# Altium PCB Main_board.PcbDoc (part 2 of 2)
Units mm, origin at the board's own origin, x right, y up, seen from the top; angles counter-clockwise.
Board outline 234.31 x 121 mm, 2 copper layers (Top Layer, Bottom Layer); 208 components, 182 nets, 717 pads, 564 vias.
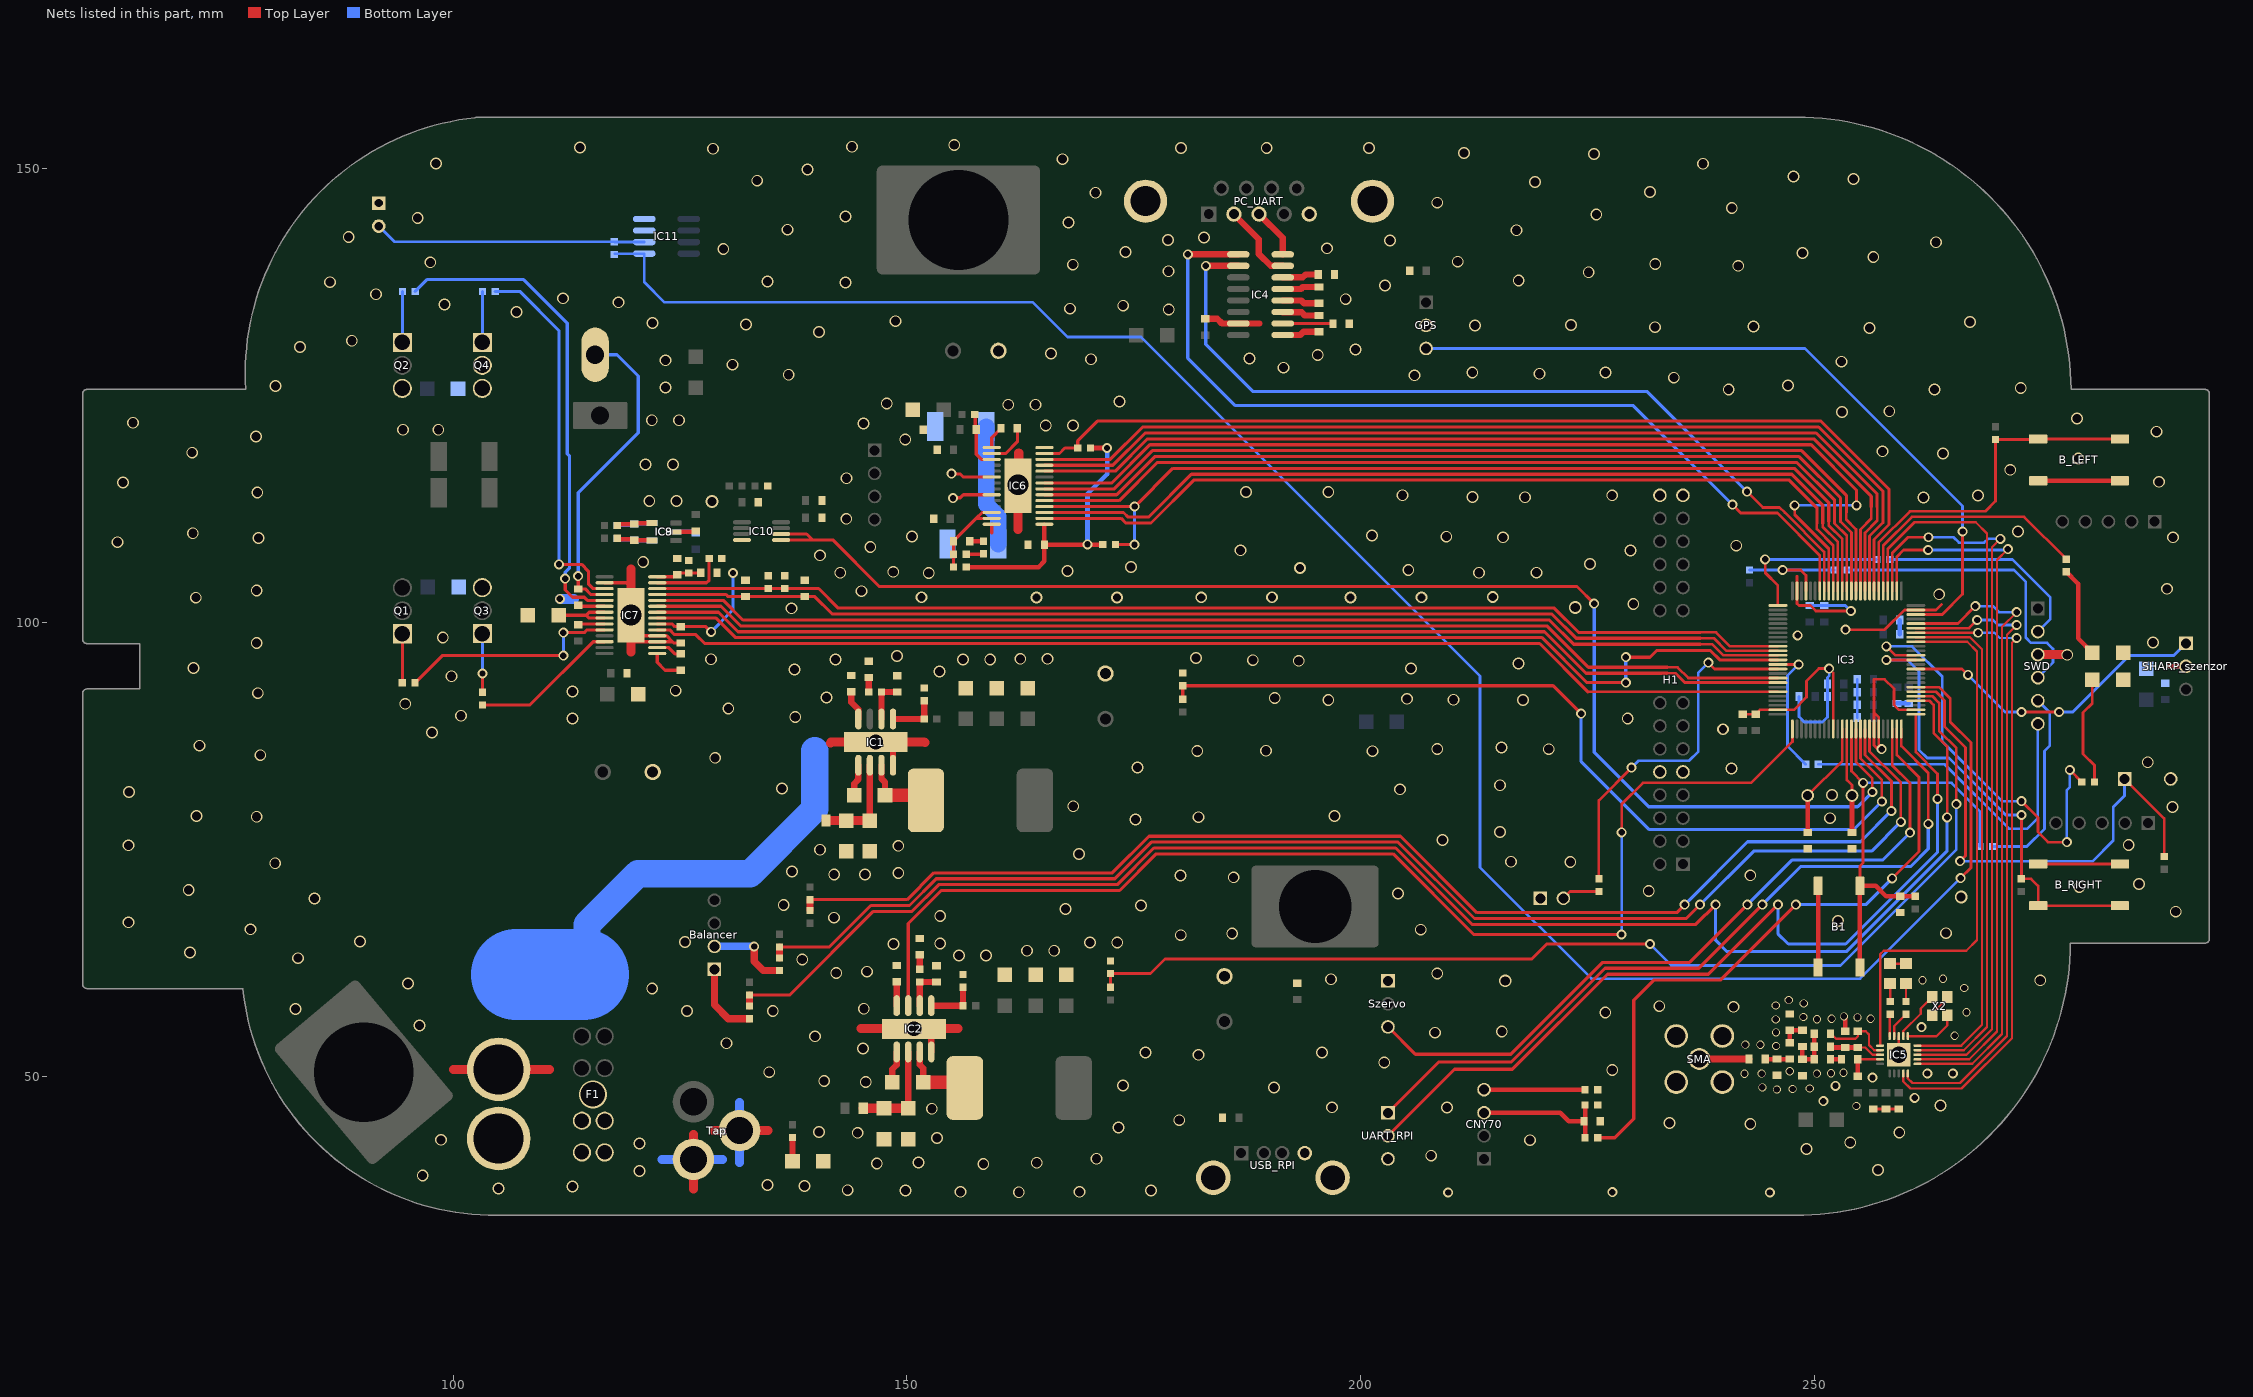
[diagram p2: the nets of this part, all layers, seen from the top]

## Via types
v1: diameter 1.3, hole 1, Top Layer to Bottom Layer, 338 vias
v2: diameter 1.1, hole 0.7, Top Layer to Bottom Layer, 154 vias
v3: diameter 0.9, hole 0.7, Top Layer to Bottom Layer, 30 vias
v4: diameter 1.3, hole 0.9, Top Layer to Bottom Layer, 11 vias
v5: diameter 5, hole 4.5, Top Layer to Bottom Layer, 10 vias
v6: diameter 1.4, hole 1, Top Layer to Bottom Layer, 5 vias
v7: diameter 1, hole 0.8, Top Layer to Bottom Layer, 4 vias
v8: diameter 1.2, hole 0.8, Top Layer to Bottom Layer, 3 vias
v9: diameter 1.6, hole 1.1, Top Layer to Bottom Layer, 2 vias
v10: diameter 2.8, hole 2.3, Top Layer to Bottom Layer, 2 vias
v11: diameter 2.1, hole 1.6, Top Layer to Bottom Layer, 2 vias
v12: diameter 3.1, hole 2.7, Top Layer to Bottom Layer, 1 vias
v13: diameter 2.3, hole 1.8, Top Layer to Bottom Layer, tented top, 1 vias
v14: diameter 1.5, hole 1, Top Layer to Bottom Layer, 1 vias

## Nets (pads, with @x,y where several pads share a name; then routed paths per layer and width w, separated by ;. In a path a pad name is that pad's centre, name@x,y a point inside that pad or via, vN(x,y) a via of type N, cw(c..) or ccw(c..) an arc to the next point about the centre after c; other vN are vias at no path point) (continued)
GND: Akku.1 B1.1 B_LEFT.1 B_RIGHT.1 C1.2 C2.2 C3.2 C5.2 C6.2 C7.2 C8.2 C9.2 C10.2 C11.2 C12.2 C13.2 C15.2 C16.2 C17.2 C18.2 C19.2 C20.2 C21.2 C22.2 C22b.2 C23.1 C24.1 C25.1 C26.1 C27.1 C28.1 C29.1 C30.2 C30b.2 C31.2 C31b.2 C32.2 C32b.2 C33.2 C34.1 C35.1 C37.1 C39.1 C40.1 C41.1 C42.1 C44.2 C45.2 C46.2 C48.1 C49.2 C50.1 C51.1 C52.1 C53.1 C56.1 C57.1 C58.2 C59.1 C60.1 C61.1 C62.1 C64.1 C67.2 C68.2 C69.1 C71.1 C73.1 C74.2 C74b.2 C75.1 C76.1 C77.2 C78.1 C79.2 C80.2 D1.2 D2.2 D3.2 D4.1 D5.1 D6.K D7.K GPS.2 H1.9 H1.10 H1.33 H1.34 IC1.4 IC1.9 IC2.4 IC2.9 IC3.10 IC3.19 IC3.20 IC3.27 IC3.49 IC3.74 IC3.99 IC4.15 IC5.18 IC5.21 IC6.14 IC6.28 IC6.29 IC7.2 IC7.17 IC7.18 IC7.29 IC8.2 IC9.2 IC10.4 IC11.3 IC11.4 PC_UART.5 PC_UART.10 PC_UART.11 Q3.3 Q4.3 R4.1 R7.1 R15.1 R17.1 R32.1 R33.1 R34.1 R35.1 R37.1 R39.1 R41.1 R53.1 R55.1 R56.1 R_Th.3 SHARP_szenzor.2 SMA.2 SWD.3 Szervo.1 Tap.2 Tap.3 UART_RPI.3 USB_RPI.4 USB_RPI.5 USB_RPI.6 X2.2 X2.4 | length 299.3
  Top Layer w0.25: v13(259.267,52.41) IC5.18@259.267,54.46 ; X2.4@262.957,56.773 X2.4@262.957,56.957
  Top Layer w0.254: X2.4@262.967,56.957 X2.2@264.617,58.607
  Top Layer w0.3: C61.1@124.959,97.886 C61.1@125.074,97.771 ; C34.1@242.1,89.92 C33.2@243.5,89.92 243.987,90.407 IC3.99@245.954,90.407 247.707,90.407 249.1,91.8 249.1,93.58 250.47,94.95 v2(251.6,94.95) ; 248.054,105.116 IC3.74@248.054,103.507 248.054,102.106 248.27,101.89 249.54,101.89 250.14,101.29 v2(254,101.29) ; IC3.10@252.054,88.307 252.054,94.496 ; v2(253.41,99.24) 257.73,99.24 259.897,101.407 IC3.49@261.154,101.407 263.357,101.407 263.97,102.02 ; C40.1@256.469,46.43 C41.1@257.869,46.43 C42.1@259.269,46.43 ; v2@257.05,86.01 256.554,86.506 IC3.19@256.554,88.307 256.554,90.096 ; v2(257.38,86.08) 257.054,86.406 IC3.20@257.054,88.307 257.054,89.596 256.554,90.096 ; D6.K@258.32,62.45 D7.K@260.08,62.45 ; IC3.27@261.154,90.407 259.273,90.407 258.75,90.93 258.75,92.74 257.72,93.77 256.554,93.77 256.554,90.096
  Top Layer w0.35: IC7.2@116.7,104.411 119.089,104.411 119.62,103.88 ; IC7.29@119.33,98.561 IC7.18@122.5,98.561 123.53,98.561 124.18,97.911 ; IC7.29@119.58,97.911 IC7.17@122.5,97.911 124.18,97.911 ; C61.1@125.074,97.771 124.32,97.771 124.18,97.911 ; 159.35,109.9 IC6.14@159.35,110.851 ; B_RIGHT.1@274.63,73.43 B_RIGHT.1@283.63,73.43
  Top Layer w0.5: IC9.2@124.577,110.02 C71.1@126.66,110.02 ; C57.1@156.93,108.99 R32.1@158.44,108.99 ; B1.1@250.39,62.02 B1.1@250.39,71.02 ; C48.1@253.37,55.01 v3@253.37,56.49 ; B_LEFT.1@274.54,115.64 B_LEFT.1@283.74,115.64 ; 289.05,95.2 SHARP_szenzor.2@290.91,95.2
  Top Layer w0.7: IC1.4@148.469,84.301 IC1.9@148.469,86.51 ; IC2.4@152.689,52.721 IC2.9@152.689,55.283 ; C35.1@182.88,133.48 184.2,133.48 184.714,132.966 IC4.15@186.51,132.966 188.816,132.966
  Top Layer w1: 100.037,50.803 110.62,50.803 ; 119.62,96.79 v10(119.62,100.836) 119.62,103.88 119.62,105.9 ; 126.49,37.62 126.49,43.63 ; 128.7,44.055 134.685,44.055 ; 141.57,86.77 141.663,86.863 v11(146.564,86.863) 151.917,86.863 151.99,86.79 ; 144.933,55.283 v11(150.784,55.283) 152.689,55.283 155.643,55.283 ; 162.25,110.29 IC6.29@162.25,115.076 v10(162.25,115.2) 162.324,115.274 162.324,118.696 ; SWD.3@274.59,96.49 v1@277.81,96.49
  Bottom Layer w0.3: C21.2@248.27,91.87 248.27,89.65 248.86,89.06 250.88,89.06 251.42,89.6 C22.2@251.42,91.87 C22b.2@251.42,93.25 251.42,93.97 251.6,94.15 v2(251.6,94.95) ; C29.1@254.7,89.56 C28.1@254.7,90.96 C27.1@254.7,92.36 C26.1@254.7,93.76
  Bottom Layer w0.35: C32.2@249.45,101.89 C32b.2@251.06,101.89 253.4,101.89 v2(254,101.29) ; C32.2@249.52,101.92 C32.2@249.571,101.92
  Bottom Layer w0.5: IC8.2@124.577,110.02 C69.1@126.76,110.02 ; C30.2@259.07,91.11 C30b.2@260.36,91.11 ; C31b.2@259.37,98.75 C31.2@259.37,100.3 ; 289.01,95.2 SHARP_szenzor.2@290.91,95.2
  Bottom Layer w1: 123.04,40.88 Tap.2@126.49,40.88 129.68,40.88 ; 131.57,40.52 Tap.3@131.57,44.055 131.57,47.14
  Bottom Layer w1.1: v2(111.77,102.63) 113.31,102.63
  Bottom Layer w1.8: R33.1@158.744,121.625 158.744,113.056 160.074,111.726 R34.1@160.074,108.655
  Bottom Layer w3: 114.75,60.03 114.75,66.73 120.37,72.35 132.73,72.35 139.86,79.48 139.86,85.9
  Bottom Layer w10: 106.97,61.26 114.38,61.26
  other v1: 162.33,37.26 155.91,37.31 169.01,37.31 149.84,37.44 176.89,37.45 143.48,37.49 105,37.69 113.16,37.89 138.71,37.94 134.63,38.07 96.66,39.12 120.56,39.62 256.97,39.7 158.42,40.39 146.69,40.43 164.31,40.51 151.27,40.53 170.9,40.95 207.76,41.29 249.09,42.02 120.56,42.62 253.93,42.76 218.63,43 98.69,43.04 153.33,43.25 144.58,43.81 259.33,43.86 140.32,43.9 173.3,44.41 242.92,44.78 234,44.9 180.01,45.2 152.75,46.46 196.82,46.62 209.5,46.6 263.87,46.82 190.44,48.8 173.8,49.02 145.47,49.42 140.89,49.52 134.84,50.49 227.71,50.73 202.59,51.56 182.12,52.4 176.29,52.66 195.72,52.67 145.17,53.09 130.14,53.68 139.87,54.44 208.17,54.84 215.54,54.98 96.31,55.63 226.94,57.08 125.79,57.23 135.23,57.23 82.65,57.46 145.26,57.48 241.05,57.69 232.89,57.76 121.94,59.72 95.04,60.25 274.86,60.61 196.73,60.73 208.43,61.35 142.22,61.42 145.6,61.56 138.47,62.91 82.91,63.05 155.73,63.33 158.73,63.33 71.01,63.66 163.23,63.87 166.23,63.87 148.52,64.6 153.67,64.68 170.18,64.77 173.18,64.77 125.57,64.84 89.75,64.89 180.17,65.58 185.84,65.76 264.49,65.8 206.61,66.19 77.7,66.23 64.25,67 252.57,67.15 141.96,67.51 153.67,67.68 289.78,68.17 167.49,68.48 175.8,68.84 136.43,68.92 84.75,69.63 204.12,70.18 231.73,70.45 70.88,70.55 279.16,70.87 285.74,71.23 186,71.96 180.14,72.17 242.92,72.18 141.99,72.26 145.38,72.27 149.06,72.43 137.33,72.59 80.41,73.51 223.09,73.63 216.56,73.67 168.97,74.53 140.43,74.99 149.06,75.43 64.24,75.48 284.6,75.51 209.02,76.08 215.34,76.96 175.17,78.31 251.71,78.47 182.14,78.58 78.37,78.63 71.73,78.7 197.1,78.72 289.42,79.72 168.33,79.79 251.91,81.04 64.31,81.35 204.31,81.65 136.23,81.73 215.34,82.1 240.83,83.93 175.41,84.04 286.7,84.63 128.88,85.12 78.77,85.41 201.28,85.85 181.99,85.87 189.55,85.9 220.71,86.07 208.43,86.1 215.52,86.27 72.06,86.46 97.69,87.92 113.17,89.44 229.41,89.46 137.7,89.63 100.89,89.76 130.33,90.55 94.74,91.07 196.43,91.49 217.89,91.49 210.22,91.52 205.11,91.62 190.53,91.7 141.13,91.77 78.5,92.24 113.17,92.44 124.53,92.52 99.85,94.11 153.58,94.63 137.62,94.84 205.53,94.95 71.4,95.01 217.38,95.5 193.17,95.81 188.11,95.88 142.14,95.94 156.18,95.94 159.18,95.94 128.43,95.98 162.5,96.03 165.5,96.03 181.84,96.13 148.9,96.34 277.83,96.47 78.37,97.77 287.29,97.83 98.88,98.39 137.3,101.59 230.03,102.06 71.67,102.76 263.72,103.13 145,103.48 78.37,103.55 288.82,103.74 152.41,105.47 142.66,105.51 213.03,105.51 219.37,105.52 148.5,105.61 167.71,105.7 205.24,105.82 174.68,106.14 225.24,106.48 120.95,106.71 140.44,107.43 229.73,107.96 186.75,107.98 145.97,108.33 241.37,108.49 63.05,108.88 78.57,109.34 215.66,109.41 289.47,109.41 209.43,109.48 150.57,109.5 201.24,109.6 71.34,109.86 272.42,110.07 143.33,111.45 121.63,113.42 124.63,113.42 261.98,113.79 218.11,113.83 212.32,113.86 268.01,114.03 204.6,114.05 227.7,114.04 78.44,114.34 187.35,114.42 196.43,114.42 63.64,115.45 287.93,115.53 143.34,115.92 271.55,116.85 121.22,117.42 124.22,117.42 279.05,118.1 264.16,118.66 71.27,118.74 257.47,118.89 149.82,120.19 78.31,120.52 287.68,121.05 94.48,121.26 98.38,121.26 165.3,121.74 168.3,121.74 145.21,121.94 64.76,122.03 121.9,122.31 124.9,122.31 278.89,122.5 253.01,123.21 258.23,123.3 161.17,124.02 164.17,124.02 147.78,124.15 173.43,124.38 263.2,125.69 240.53,125.71 272.71,125.85 123.4,125.91 80.45,126.07 247.07,126.15 234.49,127 205.92,127.26 136.98,127.32 219.68,127.43 212.29,127.57 226.97,127.57 191.48,128.1 130.79,128.43 252.96,128.76 123.4,128.91 170.3,129.03 187.74,129.1 195.26,129.5 165.89,129.65 199.43,130.11 83.13,130.37 88.85,131.07 140.33,132.04 256.04,132.48 232.4,132.56 243.26,132.63 212.59,132.76 223.15,132.8 132.29,132.87 121.98,133.03 267.12,133.12 148.74,133.22 106.99,134.25 178.85,134.51 167.97,134.6 173.83,134.93 99.06,135.06 118.24,135.3 198.34,135.65 112.13,135.74 91.53,136.19 202.66,137.16 143.24,137.5 86.44,137.52 134.65,137.6 217.4,137.72 225.11,138.61 178.82,138.72 241.59,139.32 168.28,139.45 232.44,139.52 97.5,139.71 210.69,139.78 256.47,140.3 248.65,140.73 174.08,140.84 129.78,141.16 196.28,141.25 263.38,141.92 203.22,142.1 178.76,142.15 182.72,142.43 88.51,142.49 217.16,143.24 136.86,143.3 167.8,144.1 96.11,144.58 143.24,144.74 225.95,144.98 240.88,145.68 208.43,146.28 170.79,147.37 231.87,147.45 219.2,148.57 133.51,148.7 254.3,148.89 247.67,149.16 139.04,149.93 237.69,150.57 98.12,150.59 167.16,151.07 225.7,151.65 211.37,151.75 128.64,152.22 180.19,152.3 189.64,152.3 200.9,152.3 113.98,152.34 143.95,152.44 155.22,152.64
  other v2: 209.63,37.24 245.07,37.24 227.71,37.27 250.97,47.29 261.03,47.66 252.3,48.99 256.38,49.88 262.42,50.34 265.23,50.35 261.77,55.45 248.13,98.62
  other v3: 254.6,46.76 245.84,48.59 247.58,48.64 249.46,48.7 244.25,48.82 242.28,50.32 244.16,50.33 250.25,50.33 251.8,50.37 253.18,50.43 247.27,50.59 245.76,53.37 242.37,53.53 244.03,53.51 265.42,54.5 245.74,54.87 245.71,56.31 250.27,56.33 251.87,56.38 256.17,56.38 254.73,56.53 248.76,56.57 253.22,56.64 266.74,57.09 245.72,57.83 248.8,58.07 247.15,58.43 266.48,59.76 261.88,60.62 264.15,60.79
  other v4: 239.9,88.26 164.28,102.79 173.16,102.79 182.43,102.8 198.88,102.79 206.68,102.8 151.6,102.81 190.23,102.81 214.54,102.85 193.32,106.04
  other v6: 215.92,60.55 266.14,69.79 223.63,101.67 128.54,113.37
  other v12: 115.417,48.037
NetAkku_2: Akku.2 F1.1
NetB1_2: B1.2 C25.2 IC3.14 R18.2 R59.2 | length 51.6
  Top Layer w0.3: IC3.14@254.054,88.307 254.054,83.646 v2(255.34,82.36) 255.34,73.55 254.99,73.2 B1.2@254.99,71.02
  Top Layer w0.5: B1.2@254.99,62.02 B1.2@254.99,71.02 256.72,71.02 257.87,69.87 C25.2@259.44,69.87 R18.2@261.09,69.87
  Bottom Layer w0.3: v2(255.34,82.36) 265.08,82.36 268.23,79.21 R59.2@268.23,75.35
NetB_LEFT_2: B_LEFT.2 IC3.56 R24.2 | length 40.6
  Top Layer w0.3: IC3.56@257.054,103.507 257.054,108.834 260.49,112.27 268.8,112.27 269.93,113.4 R24.2@269.93,120.2 274.586,120.2 B_LEFT.2@274.63,120.244 B_LEFT.2@283.63,120.244
NetB_RIGHT_2: B_RIGHT.2 IC3.38 R19.1 | length 50.7
  Top Layer w0.3: v2@257.917,95.907 IC3.38@261.154,95.907 ; R19.1@272.77,71.79 R19.1@272.78,71.79 ; v2@272.78,78.83 R19.1@272.78,71.79 ; B_RIGHT.2@283.63,68.83 B_RIGHT.2@274.63,68.83 274.63,71.01 273.85,71.79 R19.1@272.78,71.79
  Bottom Layer w0.3: v2(257.91,95.9) 260.24,95.9 261.51,94.63 261.51,85.99 262.41,85.09 264.8,85.09 271.06,78.83 v2(272.79,78.83)
NetC1_1: C1.1 C2.1 IC1.2 L1.2 | length 10.9
  Top Layer w0.7: C2.1@145.929,78.219 IC1.2@145.929,84.301
  Top Layer w1: L1.2@141.079,78.219 C2.1@145.929,78.219
NetC3_1: C3.1 IC1.8 | length 3.3
  Top Layer w0.7: C3.1@143.89,92.39 143.89,91.24 144.659,90.471 IC1.8@144.659,89.401
NetC4_1: C4.1 IC1.1 | length 3.5
  Top Layer w0.7: C4.1@144.19,81 144.19,82.26 144.659,82.729 IC1.1@144.659,84.301
NetC4_2: C4.2 IC1.3 L2.1 | length 7.4
  Top Layer w0.7: IC1.3@147.199,84.301 147.199,82.831 147.59,82.44 C4.2@147.59,81
  Top Layer w1.5: C4.2@147.59,81 L2.1@151.532,81
NetC5_1: C5.1 R2.1 | length 1.6
  Top Layer w0.7: R2.1@145.8,92.37 C5.1@145.8,93.96
NetC6_1: C6.1 IC1.6 R2.2 | length 4.7
  Top Layer w0.7: IC1.6@147.199,89.401 147.199,92.369 C6.1@148.93,92.37
NetC11_1: C11.1 C12.1 IC2.2 L3.2 | length 11.2
  Top Layer w0.7: C12.1@150.15,46.52 IC2.2@150.149,52.721
  Top Layer w1: L3.2@145.19,46.52 C12.1@150.15,46.52
NetC13_1: C13.1 IC2.8 | length 2.6
  Top Layer w0.7: IC2.8@148.879,57.821 C13.1@148.879,60.439
NetC14_1: C14.1 IC2.1 | length 3.5
  Top Layer w0.7: C14.1@148.39,49.38 148.39,50.8 148.879,51.289 IC2.1@148.879,52.721
NetC14_2: C14.2 IC2.3 L4.1 | length 7.5
  Top Layer w0.7: IC2.3@151.419,52.721 151.419,51.301 151.79,50.93 C14.2@151.79,49.38
  Top Layer w1.5: C14.2@151.79,49.38 L4.1@155.752,49.38
NetC15_1: C15.1 R5.1 | length 1.6
  Top Layer w0.7: R5.1@151.42,61.82 C15.1@151.42,63.43
NetC16_1: C16.1 IC2.6 R5.2 | length 4.4
  Top Layer w0.7: IC2.6@151.419,57.821 R5.2@151.42,60.42 R5.2@151.42,60.42 C16.1@153.27,60.42
NetC23_2: C23.2 IC3.12 X1.2 | length 13
  Top Layer w0.3: X1.2@249.237,80.967 253.054,84.784 IC3.12@253.054,88.307
  Top Layer w0.5: C23.2@249.237,76.9 X1.2@249.237,80.967
NetC24_2: C24.2 IC3.13 X1.1 | length 11.6
  Top Layer w0.3: IC3.13@253.554,88.307 253.554,82.676 254.117,82.113 X1.1@254.117,80.967
  Top Layer w0.5: C24.2@254.117,76.9 X1.1@254.117,80.967
NetC36_1: C36.1 IC4.3 | length 4.2
  Top Layer w0.7: IC4.3@191.41,134.236 191.41,134.19 193.5,134.19 193.84,133.85 C36.1@195.4,133.85
NetC36_2: C36.2 IC4.1 | length 4.1
  Top Layer w0.7: IC4.1@191.41,131.696 193.346,131.696 193.7,132.05 C36.2@195.4,132.05
NetC37_2: C37.2 IC4.2 | length 5.5
  Top Layer w0.35: IC4.2@191.41,132.966 C37.2@196.94,132.966
NetC38_1: C38.1 IC4.5 | length 4.1
  Top Layer w0.7: IC4.5@191.41,136.776 193.416,136.776 193.63,136.99 C38.1@195.4,136.99
NetC38_2: C38.2 IC4.4 | length 4.1
  Top Layer w0.7: IC4.4@191.41,135.506 193.434,135.506 193.75,135.19 C38.2@195.4,135.19
NetC39_2: C39.2 IC4.6 | length 4
  Top Layer w0.7: IC4.6@191.41,138.046 193.626,138.046 193.95,138.37 C39.2@195.31,138.37
NetC43_1: C43.1 IC5.4 L6.2 | length 4.3
  Top Layer w0.25: C43.1@254.76,51.91 IC5.4@257.217,51.91
  Top Layer w0.5: L6.2@254.76,50.03 C43.1@254.76,51.91
NetC43_2: C43.2 L7.2 | length 1.2
  Top Layer w0.5: L7.2@251.76,51.91 C43.2@252.96,51.91
NetC44_1: C44.1 C47.1 L7.1 L8.2 L11.1 | length 5.5
  Top Layer w0.5: L8.2@248.66,53.31 C44.1@248.66,51.91 L7.1@249.96,51.91 L11.1@249.96,53.31 C47.1@249.96,54.71
NetC45_1: C45.1 L8.1 L9.2 | length 2.8
  Top Layer w0.5: L9.2@247.26,53.74 C45.1@247.26,55.11 L8.1@248.66,55.11
NetC46_1: C46.1 CC1.2 L9.1 | length 2.7
  Top Layer w0.5: CC1.2@244.56,51.94 L9.1@247.26,51.94
NetC47_2: C47.2 IC5.2 L10.1 | length 7.8
  Top Layer w0.25: C47.2@251.836,54.71 252.361,54.185 254.515,54.185 254.77,54.44 L10.1@254.77,55.01 255.63,55.01 256,54.64 256,53.49 256.58,52.91 IC5.2@257.217,52.91
NetC48_2: C48.2 IC5.3 L10.2 L11.2 | length 5.7
  Top Layer w0.25: L10.2@254.77,53.21 255.58,53.21 256.38,52.41 IC5.3@257.217,52.41
  Top Layer w0.5: L11.2@251.86,53.21 C48.2@253.37,53.21 L10.2@254.77,53.21
NetC54_1: C54.1 IC6.3 R27.2 | length 6.2
  Top Layer w0.35: C54.1@157.54,121.45 R27.2@157.54,122.95 ; C54.1@157.64,121.29 157.64,118.57 158.209,118.001 IC6.3@159.35,118.001
NetC55_1: C55.1 IC6.2 | length 4.8
  Top Layer w0.35: IC6.2@159.35,118.651 160.891,118.651 162.17,119.93 C55.1@162.17,121.42
NetC55_2: C55.2 IC6.1 | length 2.5
  Top Layer w0.35: IC6.1@159.35,119.301 159.35,120.4 C55.2@160.37,121.42
NetC57_2: C57.2 IC6.12 IC6.13 R30.1 R31.2 | length 10.1
  Top Layer w0.35: R30.1@155.13,106.15 C57.2@155.13,108.99 157.641,111.501 ; IC6.13@159.35,111.501 157.641,111.501 ; IC6.12@159.35,112.151 158.291,112.151 157.641,111.501
NetC61_2: C61.2 IC7.20 R36.2 R38.2 R40.2 | length 13.8
  Top Layer w0.35: IC7.20@122.5,99.861 124.156,99.861 124.447,99.571 C61.2@125.074,99.571 127.859,99.571 v2(128.43,99)
  Bottom Layer w0.35: v2(128.43,99) 130.85,101.42 v2(130.85,105.48)
NetC62_2: C62.2 IC7.28 R40.1 R41.2 | length 5.1
  Top Layer w0.35: IC7.28@122.5,105.061 124.285,105.061 124.7,105.476 127.376,105.476 R40.1@127.39,105.49
NetC63_1: C63.1 IC7.16 | length 2.9
  Top Layer w0.35: IC7.16@122.5,97.261 123.759,97.261 124.444,96.576 C63.1@125.074,96.576
NetC63_2: C63.2 IC7.15 | length 3.9
  Top Layer w0.35: IC7.15@122.5,96.611 122.5,95.63 123.354,94.776 C63.2@125.074,94.776
NetC64_2: C64.2 IC7.7 IC7.8 | length 7.4
  Top Layer w0.35: C64.2@111.63,100.83 114.68,100.83 ; IC7.8@116.7,100.511 114.999,100.511 114.68,100.83 ; IC7.7@116.7,101.161 115.011,101.161 114.68,100.83
NetC65_1: C65.1 IC7.9 | length 2.8
  Top Layer w0.35: C65.1@113.861,99.861 IC7.9@116.7,99.861
NetC66_1: C66.1 IC7.6 | length 2.8
  Top Layer w0.35: C66.1@113.909,101.811 IC7.6@116.7,101.811
NetC66_2: C66.2 IC7.4 M1.2 Q2.3 Q4.2 | length 35.1
  Top Layer w0.35: v2(113.79,105.14) C66.2@113.79,103.73 114.56,103.73 115.179,103.111 IC7.4@116.7,103.111
  Bottom Layer w0.35: v2(113.79,105.14) 113.79,114.32 120.41,120.94 120.41,127.18 118.065,129.525 M1.2@115.658,129.525
NetC70_1: C70.1 IC8.4 R49.1 | length 3.6
  Bottom Layer w0.5: R49.1@118.3,109.18 C70.1@119.98,109.18 ; C70.1@120,109.07 IC8.4@121.923,109.07
NetC70_2: C70.2 IC8.5 R48.1 | length 3.6
  Bottom Layer w0.5: R48.1@118.25,110.81 C70.2@119.98,110.81 ; C70.2@120.06,110.97 IC8.5@121.923,110.97
NetC72_1: C72.1 IC9.4 R51.1 | length 3.6
  Top Layer w0.5: R51.1@118.25,110.83 C72.1@119.98,110.83 ; C72.1@120.06,110.97 IC9.4@121.923,110.97
NetC72_2: C72.2 IC9.5 R50.1 | length 3.7
  Top Layer w0.5: R50.1@118.22,109.18 C72.2@119.98,109.18 ; C72.2@120,109.07 IC9.5@121.923,109.07
NetC76_2: C76.2 CNY70.3 R54.1 R55.2 | length 15.1
  Top Layer w0.5: CNY70.3@213.58,46.02 221.96,46.02 222.9,45.08 C76.2@224.71,45.08 ; R54.1@224.71,43.28 C76.2@224.71,45.08 ; R55.2@224.71,46.87 C76.2@224.71,45.08 ; C76.2@224.72,45.08 C76.2@224.71,45.08
NetCC1_1: CC1.1 SMA.1 | length 5.5
  Top Layer w0.8: SMA.1@237.3,51.94 CC1.1@242.76,51.94
NetCNY70_4: CNY70.4 R56.2 | length 11.1
  Top Layer w0.5: CNY70.4@213.58,48.56 R56.2@224.7,48.56
NetD1_1: D1.1 R1.1 | length 2.6
  Top Layer w0.7: D1.1@137.4,40.67 R1.1@137.4,43.29
NetD2_1: D2.1 R20.2 | length 12.2
  Top Layer w0.3: D2.1@280.6,93.707 280.6,91.13 279.57,90.1 279.57,85.56 280.83,84.3 R20.2@280.83,82.46
NetD3_1: D3.1 R23.1 | length 10.1
  Top Layer w0.5: R23.1@277.73,105.607 279.02,104.317 279.02,98.287 D3.1@280.6,96.707
NetD4_2: D4.2 IC11.2 R22.1 | length 29.9
  Bottom Layer w0.3: D4.2@91.82,143.69 93.54,141.97 R22.1@117.75,141.97 ; R22.1@117.785,141.935 IC11.2@121.07,141.935
NetD5_2: D5.2 R22b.1 | length 4.2
  Top Layer w0.3: D5.2@222.32,69.65 223.07,70.4 R22b.1@226.24,70.4
NetD6_1: D6.A R25.1 | length 2
  Top Layer w0.25: R25.1@258.32,58.28 D6.A@258.32,60.25
NetD7_1: D7.A R26.1 | length 2
  Top Layer w0.25: R26.1@260.08,58.28 D7.A@260.08,60.25
NetGPS_3: GPS.3 IC3.48 | length 82.6
  Top Layer w0.3: IC3.48@261.154,100.907 264.057,100.907 266.3,103.15 v2(266.3,110.05)
  Bottom Layer w0.3: GPS.3@206.7,130.22 248.95,130.22 266.3,112.87 v2(266.3,110.05)
NetIC1_5: IC1.5 R3.2 R4.2 | length 5.4
  Top Layer w0.7: IC1.5@148.469,89.401 151.891,89.401 R3.2@151.9,89.41 R4.2@151.9,91.41
NetIC2_5: IC2.5 R6.2 R7.2 | length 5.5
  Top Layer w0.7: IC2.5@152.689,57.821 R6.2@156.18,57.82 156.18,57.822 R7.2@156.18,59.84
NetIC2_7: IC2.7 IC3.1 | length 131.9
  Top Layer w0.3: v2(228.74,76.92) 228.74,80.01 231.09,82.36 243.01,82.36 247.554,86.904 IC3.1@247.554,88.307
  Top Layer w0.35: IC2.7@150.149,57.821 150.149,66.869 153.78,70.5 173.438,70.5 177.478,74.54 203.57,74.54 212.45,65.66 v2(228.73,65.66)
  Bottom Layer w0.3: v2@228.74,65.66 v2(228.74,76.92)
NetIC3_15: IC3.15 IC10.5 IC10.6 | length 154.1
  Top Layer w0.3: IC3.15@254.554,88.307 254.554,84.656 256.36,82.85 v2(256.36,81.35)
  Top Layer w0.35: IC10.5@136.14,109.125 139.605,109.125 ; IC10.6@136.14,109.775 138.955,109.775 139.605,109.125 ; v2(225.72,102.1) 223.82,104 146.96,104 141.835,109.125 139.605,109.125
  Bottom Layer w0.35: v2(225.72,102.1) 225.72,85.72 231.71,79.73 254.74,79.73 v2(256.36,81.35)
NetIC3_16: IC3.16 R16.1 R17.2 | length 98.4
  Top Layer w0.3: IC3.16@255.054,88.307 255.054,85.046 257.41,82.69 v2(257.41,80.31)
  Top Layer w0.35: R16.1@180.4,91.57 R17.2@180.4,93.07 221.19,93.07 v2(224.28,89.98)
  Bottom Layer w0.35: v2(224.28,89.98) 224.28,84.7 231.74,77.24 254.34,77.24 v2(257.41,80.31)
NetIC3_17: IC3.17 R8.1 R9.2 | length 141.6
  Top Layer w0.3: IC3.17@255.554,88.307 255.554,85.446 258.46,82.54 v2(258.46,79.27)
  Top Layer w0.35: R9.2@139.32,69.5 150.022,69.5 152.972,72.45 172.63,72.45 176.67,76.49 204.378,76.49 212.798,68.07 234.807,68.07 v2(235.677,68.94)
  Top Layer w0.8: R8.1@139.32,68.3 R9.2@139.32,69.5
  Bottom Layer w0.35: v2(235.677,68.94) 242.607,75.87 255.06,75.87 v2(258.46,79.27)
NetIC3_18: IC3.18 R10.1 R11.2 | length 149.1
  Top Layer w0.3: IC3.18@256.054,88.307 256.054,85.836 259.5,82.39 v2(259.5,78.07)
  Top Layer w0.35: R11.2@135.97,64.28 141.47,64.28 146.04,68.85 150.292,68.85 153.242,71.8 172.899,71.8 176.939,75.84 204.108,75.84 212.528,67.42 235.85,67.42 v2(237.37,68.94)
  Top Layer w0.8: R10.1@135.97,63.08 R11.2@135.97,64.28
  Bottom Layer w0.35: v2(237.37,68.94) 243.28,74.85 256.28,74.85 v2(259.5,78.07)
NetIC3_23: IC3.23 Szervo.3 | length 81.1
  Top Layer w0.3: IC3.23@258.554,88.307 258.554,84.276 260.5,82.33 260.5,76.93 v2@260.45,76.88
  Top Layer w0.35: Szervo.3@203,55.48 206.02,52.46 216.52,52.46 226.64,62.58 236.23,62.58 v2(242.59,68.94)
  Bottom Layer w0.35: v2(242.59,68.94) 247.5,73.85 257.48,73.85 v2(260.51,76.88)
NetIC3_24: IC3.24 R54.2 | length 70.6
  Top Layer w0.3: v2(258.54,71.85) 261.51,74.82 261.51,82.98 259.054,85.436 IC3.24@259.054,88.307
  Top Layer w0.35: R54.2@226.1,43.27 228,43.27 230.07,45.34 230.07,58.42 232.28,60.63 239.61,60.63 v2(247.93,68.95)
  Bottom Layer w0.35: v2(247.93,68.95) 255.64,68.95 v2(258.54,71.85)
NetIC3_25: IC3.25 UART_RPI.1 | length 86
  Top Layer w0.3: IC3.25@259.554,88.307 259.554,86.416 262.52,83.45 v2(262.52,77.84)
  Top Layer w0.35: UART_RPI.1@203,46.02 208.59,51.61 216.589,51.61 226.909,61.93 237.23,61.93 v2(244.24,68.94)
  Bottom Layer w0.35: v2(244.24,68.94) 248.44,73.14 260.56,73.14 262.52,75.1 v2(262.52,77.84)
NetIC3_26: IC3.26 UART_RPI.2 | length 94.8
  Top Layer w0.3: IC3.26@261.154,89.907 261.154,85.746 263.54,83.36 v2(263.54,80.61)
  Top Layer w0.35: UART_RPI.2@203,43.48 210.33,50.81 216.708,50.81 227.178,61.28 238.3,61.28 v2(245.96,68.94)
  Bottom Layer w0.35: v2(245.96,68.94) 245.96,65.76 247.11,64.61 253.417,64.61 263.55,74.743 v2@263.55,80.35
NetIC3_29: IC3.29 R12.1 R13.2 | length 172.1
  Top Layer w0.3: IC3.29@261.154,91.407 262.643,91.407 263.12,90.93 263.12,87.84 264.6,86.36 v2(264.6,78.57)
  Top Layer w0.35: R13.2@132.67,58.99 137.099,58.99 146.309,68.2 150.561,68.2 153.511,71.15 173.168,71.15 177.208,75.19 203.839,75.19 212.259,66.77 236.92,66.77 v2(239.09,68.94)
  Top Layer w0.8: R12.1@132.67,57.79 R13.2@132.67,58.99
  Bottom Layer w0.35: v2(239.09,68.94) 239.09,65.03 240.35,63.77 253.496,63.77 264.6,74.874 v2(264.6,78.57)
NetIC3_30: IC3.30 R14.1 R15.2 | length 122.1
  Top Layer w0.3: R14.1@172.43,59.85 172.43,61.35 176.82,61.35 178.43,62.96 218.84,62.96 220.49,64.61 v2(231.86,64.61) ; IC3.30@261.154,91.907 262.993,91.907 263.72,91.18 263.72,88.089 265.61,86.199 v2(265.61,80.02)
  Bottom Layer w0.3: v2(231.86,64.61) 234.22,62.25 252.86,62.25 265.61,75 v2(265.61,80.02)
NetIC3_31: IC3.31 R21.2 R_Th.1 | length 57.9
  Top Layer w0.3: IC3.31@261.154,92.407 263.343,92.407 264.32,91.43 264.32,88.57 266.62,86.27 266.62,74.33 v2(266.03,73.74) ; R_Th.1@284.15,82.79 288.51,78.43 R21.2@288.51,74.26
  Bottom Layer w0.3: v2(266.03,73.74) 280.65,73.74 282.9,75.99 282.9,79.69 284.15,80.94 R_Th.1@284.15,82.79
NetIC3_32: IC3.32 IC11.1 R22.2 | length 225.6
  Top Layer w0.3: IC3.32@261.154,92.907 263.703,92.907 264.93,91.68 264.93,89.096 267.22,86.806 267.22,73.01 v2(266.08,71.87)
  Bottom Layer w0.3: R22.2@117.845,140.665 IC11.1@121.07,140.665 121.07,137.53 123.3,135.3 163.88,135.3 167.7,131.48 175.8,131.48 213.14,94.14 213.14,73.05 225.4,60.79 255,60.79 v2(266.08,71.87)
NetIC3_36: IC3.36 SHARP_szenzor.1 | length 34.9
  Top Layer w0.3: IC3.36@261.154,94.907 266.243,94.907 v2(266.895,94.255)
  Top Layer w0.35: v2(272.79,90.17) v2(276.94,90.17)
  Bottom Layer w0.3: v2(266.895,94.255) 270.98,90.17 v2(272.79,90.17)
  Bottom Layer w0.35: v2(276.94,90.17) 278.44,90.17 284.66,96.39 289.56,96.39 SHARP_szenzor.1@290.91,97.74
NetIC3_39: IC3.39 R20.1 | length 47.5
  Top Layer w0.3: v2(257.91,97.4) 258.903,96.407 IC3.39@261.154,96.407 ; v2(272.79,80.34) 274.6,78.53 274.6,76.94 275.71,75.83 v2(277.79,75.83) ; v2(278.115,83.775) R20.1@279.43,82.46
  Bottom Layer w0.3: v2(257.91,97.4) 260.72,97.4 264.06,94.06 264.06,86.93 270.64,80.35 272.78,80.35 v2(272.79,80.34) ; v2(277.79,75.83) 277.79,81.56 278.115,81.885 v2(278.115,83.775)
NetIC3_42: IC3.42 IC5.1 | length 60.3
  Top Layer w0.25: IC5.1@257.217,53.41 257.217,63.477 257.62,63.88 266.71,63.88 267.89,65.06 267.89,96.83 266.813,97.907 IC3.42@261.154,97.907
NetIC3_43: IC3.43 IC5.15 | length 57.3
  Top Layer w0.25: IC3.43@261.154,98.407 267.123,98.407 268.44,97.09 268.44,55.71 266.14,53.41 IC5.15@261.317,53.41
NetIC3_44: IC3.44 IC5.9 | length 71.1
  Top Layer w0.25: IC5.9@259.767,50.36 259.767,49.473 260.55,48.69 266.19,48.69 271.74,54.24 271.74,97.8 v2(272.26,98.32) ; IC3.44@261.154,98.907 v2@268.01,98.907
  Bottom Layer w0.25: v2(268.01,98.9) 269.82,98.9 270.4,98.32 v2(272.26,98.32)
NetIC3_45: IC3.45 IC5.10 | length 71.3
  Top Layer w0.25: IC5.10@260.267,50.36 260.267,49.803 260.78,49.29 266.012,49.29 271.19,54.468 271.19,98.69 v2(272.26,99.76)
  Top Layer w0.3: IC3.45@261.154,99.407 267.003,99.407 v2(267.903,100.307)
  Bottom Layer w0.3: v2(267.903,100.307) 269.643,100.307 270.19,99.76 v2(272.26,99.76)
NetIC3_46: IC3.46 IC5.11 | length 70
  Top Layer w0.25: IC5.11@261.317,51.41 267.354,51.41 270.64,54.696 270.64,99.55 v2(272.26,101.17)
  Top Layer w0.3: IC3.46@261.154,99.907 265.777,99.907 v2(267.7,101.83)
  Bottom Layer w0.3: v2(267.7,101.83) 269.65,101.83 270.31,101.17 v2(272.26,101.17)
NetIC3_52: IC3.52 IC5.12 | length 79.9
  Top Layer w0.25: IC5.12@261.317,51.91 267.04,51.91 270.09,54.96 270.09,106.91 v2(271.29,108.11)
  Top Layer w0.3: IC3.52@259.054,103.507 259.054,107.274 259.8,108.02 v2(262.5,108.02)
  Bottom Layer w0.3: v2(262.5,108.02) v2@271.2,108.02
NetIC3_53: IC3.53 IC5.13 | length 81
  Top Layer w0.25: IC5.13@261.317,52.41 266.74,52.41 269.54,55.21 269.54,108.33 v2(270.46,109.25)
  Top Layer w0.3: IC3.53@258.554,103.507 258.554,107.664 260.31,109.42 v2(262.54,109.42)
  Bottom Layer w0.3: v2(262.54,109.42) 265.29,109.42 265.89,108.82 268.66,108.82 269.09,109.25 v2(270.46,109.25)
NetIC3_54: IC3.54 IC5.14 | length 80.4
  Top Layer w0.25: IC5.14@261.317,52.91 266.43,52.91 268.99,55.47 268.99,109.83 267.75,111.07
  Top Layer w0.3: IC3.54@258.054,103.507 258.054,108.104 261.02,111.07 267.75,111.07
NetIC3_55: IC3.55 R23.2 | length 28.4
  Top Layer w0.3: IC3.55@257.554,103.507 257.554,108.485 260.739,111.67 273.067,111.67 R23.2@277.73,107.007
NetIC3_57: IC3.57 IC6.27 R29.1 | length 110
  Top Layer w0.3: IC3.57@256.554,103.507 256.554,109.184 258.19,110.82 258.19,112.75
  Top Layer w0.35: IC6.27@165.15,118.651 166.811,118.651 167.41,119.25 R29.1@168.82,119.25 168.82,120.04 170.99,122.21 250.708,122.21 258.19,114.728 258.19,112.75
NetIC3_58: IC3.58 IC6.26 | length 108.4
  Top Layer w0.3: IC3.58@256.054,103.507 256.054,109.544 257.54,111.03 257.54,112.75
  Top Layer w0.35: IC6.26@165.15,118.001 172.411,118.001 175.97,121.56 250.439,121.56 257.54,114.459 257.54,112.75
NetIC3_59: IC3.59 IC6.25 | length 107.2
  Top Layer w0.3: IC3.59@255.554,103.507 255.554,109.904 256.89,111.24 256.89,112.75
  Top Layer w0.35: IC6.25@165.15,117.351 172.68,117.351 176.239,120.91 250.17,120.91 256.89,114.19 256.89,112.75
NetIC3_60: IC3.60 IC6.24 | length 106.1
  Top Layer w0.3: IC3.60@255.054,103.507 255.054,110.28 256.24,111.466 256.24,112.75
  Top Layer w0.35: IC6.24@165.15,116.701 172.949,116.701 176.508,120.26 249.901,120.26 256.24,113.921 256.24,112.75
NetIC3_61: IC3.61 IC6.21 | length 103.1
  Top Layer w0.3: 253.5,112.14 253.5,111.35 254.554,110.296 IC3.61@254.554,103.507
  Top Layer w0.35: IC6.21@165.15,114.751 172.838,114.751 177.047,118.96 248.566,118.96 253.5,114.026 253.5,112.14
NetIC3_62: IC3.62 IC6.20 | length 102.1
  Top Layer w0.3: 252.85,111.84 252.85,111.14 254.054,109.936 IC3.62@254.054,103.507
  Top Layer w0.35: IC6.20@165.15,114.101 173.107,114.101 177.316,118.31 248.297,118.31 252.85,113.757 252.85,111.84
NetIC3_63: IC3.63 IC6.19 | length 101.1
  Top Layer w0.3: 252.2,111.46 252.2,110.94 253.554,109.586 IC3.63@253.554,103.507
  Top Layer w0.35: IC6.19@165.15,113.451 173.376,113.451 177.585,117.66 248.028,117.66 252.2,113.488 252.2,111.46
NetIC3_64: IC3.64 IC6.18 R28.1 | length 106.3
  Top Layer w0.3: 251.55,111.19 251.55,110.74 253.054,109.236 IC3.64@253.054,103.507
  Top Layer w0.35: IC6.18@165.15,112.801 v2@175.08,112.801 ; R28.1@172.97,108.61 v2(175.08,108.61) ; v2(175.1,112.801) 179.309,117.01 247.758,117.01 251.55,113.218 251.55,111.19
  Bottom Layer w0.35: v2(175.08,108.61) v2@175.08,112.801
NetIC3_65: IC3.65 IC6.17 | length 99.5
  Top Layer w0.3: 250.9,110.95 250.9,110.53 252.554,108.876 IC3.65@252.554,103.507
  Top Layer w0.35: IC6.17@165.15,112.151 173.869,112.151 174.38,111.64 176.62,111.64 181.34,116.36 247.489,116.36 250.9,112.949 250.9,110.95
NetIC3_66: IC3.66 IC6.16 | length 98.4
  Top Layer w0.3: 250.25,110.95 250.25,110.32 252.054,108.516 IC3.66@252.054,103.507
  Top Layer w0.35: IC6.16@165.15,111.501 173.6,111.501 174.111,110.99 176.889,110.99 181.609,115.71 247.22,115.71 250.25,112.68 250.25,110.95
NetIC3_67: IC3.67 IC6.22 | length 112.7
  Top Layer w0.3: v2(247.81,112.94) 247.81,111.9 251.554,108.156 IC3.67@251.554,103.507
  Top Layer w0.35: IC6.22@165.15,115.401 172.569,115.401 176.778,119.61 249.61,119.61 254.61,114.61 v2(254.61,112.94)
  Bottom Layer w0.3: v2(247.81,112.94) v2(254.61,112.94)
NetIC3_68: IC3.68 IC4.10 | length 94.1
  Top Layer w0.3: v2(242.55,114.45) 244.3,112.7 246.139,112.7 246.714,112.124 246.716,112.124 251.054,107.786 IC3.68@251.054,103.507
  Top Layer w0.7: v2(182.93,139.316) IC4.10@186.51,139.316
  Bottom Layer w0.35: v2(182.93,139.316) 182.93,130.67 188.11,125.49 231.51,125.49 v2(242.55,114.45)
NetIC3_69: IC3.69 IC4.9 | length 99.5
  Top Layer w0.3: v2(240.956,113.006) 241.861,112.1 245.89,112.1 250.554,107.436 IC3.69@250.554,103.507
  Top Layer w0.7: v2(180.95,140.586) IC4.9@186.51,140.586
  Bottom Layer w0.35: v2(180.95,140.586) 180.95,129.16 186.19,123.92 230.041,123.92 v2(240.956,113.006)
NetIC3_72: IC3.72 R24b.1 R58.2 | length 13.9
  Top Layer w0.3: v2(246.48,105.82) 248.46,105.82 249.054,105.226 IC3.72@249.054,103.507
  Bottom Layer w0.3: R24b.1@242.82,105.82 v2(246.48,105.82) R58.2@252.16,105.82
NetIC3_76: IC3.76 R57.2 | length 18
  Top Layer w0.3: v2(244.56,106.98) 244.56,105.51 245.954,104.116 IC3.76@245.954,101.907
  Bottom Layer w0.3: v2(244.56,106.98) R57.2@256.88,106.98
NetIC3_85: IC3.85 IC7.26 R38.1 R39.2 | length 126.1
  Top Layer w0.3: 237.43,98.94 239.13,98.94 240.663,97.407 IC3.85@245.954,97.407
  Top Layer w0.35: IC7.26@122.5,103.761 R38.1@134.73,103.761 ; R38.1@134.73,103.77 140.28,103.77 142.44,101.61 221.32,101.61 223.99,98.94 237.43,98.94
NetIC3_86: IC3.86 IC7.25 R36.1 R37.2 | length 126
  Top Layer w0.3: 237.43,98.29 238.92,98.29 240.303,96.907 IC3.86@245.954,96.907
  Top Layer w0.35: IC7.25@122.5,103.111 130.089,103.111 130.32,102.88 R36.1@132.22,102.88 R37.2@138.75,102.881 ; R37.2@138.75,102.881 139.849,102.881 141.77,100.96 221.051,100.96 223.721,98.29 237.43,98.29
NetIC3_87: IC3.87 IC7.24 | length 126
  Top Layer w0.3: 237.43,97.64 238.71,97.64 239.943,96.407 IC3.87@245.954,96.407
  Top Layer w0.35: IC7.24@122.5,102.461 129.789,102.461 131.94,100.31 220.782,100.31 223.452,97.64 237.43,97.64
NetIC3_88: IC3.88 IC7.21 | length 129.9
  Top Layer w0.3: 239.553,95.907 IC3.88@245.954,95.907
  Top Layer w0.35: IC7.21@122.5,100.511 128.981,100.511 131.132,98.36 219.974,98.36 224.924,93.41 v2(229.2,93.41) ; v2(229.2,96.21) 231.87,96.21 232.6,96.94 238.52,96.94 239.553,95.907
  Bottom Layer w0.35: v2(229.2,93.41) v2(229.2,96.21)
NetIC3_89: IC3.89 R60.2 | length 14.6
  Top Layer w0.3: IC3.89@245.954,95.407 248.233,95.407 v2(248.24,95.4)
  Bottom Layer w0.3: v2(248.24,95.4) 247.01,94.17 247.01,86.41 R60.2@249.01,84.41
NetIC3_90: IC3.90 R22b.2 | length 40
  Top Layer w0.3: R22b.2@226.23,71.8 226.23,80.43 v2(229.83,84.03) ; v2(238.29,95.6) 238.983,94.907 IC3.90@245.954,94.907
  Bottom Layer w0.3: v2(229.83,84.03) 230.6,84.8 236.16,84.8 237.19,85.83 237.19,94.5 v2(238.29,95.6)
NetIC3_92: IC3.92 IC7.23 | length 126.7
  Top Layer w0.3: 233.79,95.09 234.91,95.09 236.093,93.907 IC3.92@245.954,93.907
  Top Layer w0.35: IC7.23@122.5,101.811 129.52,101.811 131.671,99.66 220.512,99.66 225.082,95.09 233.79,95.09
NetIC3_93: IC3.93 IC7.22 | length 126.7
  Top Layer w0.3: 233.79,94.44 234.66,94.44 235.693,93.407 IC3.93@245.954,93.407
  Top Layer w0.35: IC7.22@122.5,101.161 129.251,101.161 131.402,99.01 220.243,99.01 224.813,94.44 233.79,94.44
NetIC3_95: IC3.95 IC7.19 | length 126.3
  Top Layer w0.3: 225.043,92.407 IC3.95@245.954,92.407
  Top Layer w0.35: IC7.19@122.5,99.211 123.887,99.211 124.402,98.696 126.744,98.696 127.73,97.71 219.705,97.71 225.008,92.407 225.043,92.407
NetIC5_16: IC5.16 X2.1 | length 6
  Top Layer w0.25: IC5.16@260.267,54.46 263.43,54.46 264.607,55.637 X2.1@264.607,56.773
NetIC5_17: IC5.17 X2.3 | length 5.6
  Top Layer w0.25: IC5.17@259.767,54.46 259.767,55.027 261.68,56.94 261.68,57.495 X2.3@262.957,58.773
NetIC5_19: IC5.19 R26.2 | length 3
  Top Layer w0.25: IC5.19@258.767,54.46 258.767,55.567 R26.2@260.08,56.88
NetIC5_20: IC5.20 R25.2 | length 2.4
  Top Layer w0.25: IC5.20@258.267,54.46 R25.2@258.267,56.827
NetIC6_6: IC6.6 R33.2 | length 4.6
  Top Layer w0.35: v2@154.91,116.39 155.9,116.39 156.239,116.051 IC6.6@159.35,116.051
  other v2: 154.91,116.43
NetIC6_9: IC6.9 R34.2 | length 4.5
  Top Layer w0.35: v2@155.02,113.77 155.9,113.77 156.231,114.101 IC6.9@159.35,114.101
  other v2: 155.08,113.72
NetIC7_3: IC7.3 R45.1 | length 41.5
  Top Layer w0.35: v2(111.68,106.43) 114.17,106.43 114.92,105.68 114.92,104.3 115.459,103.761 IC7.3@116.7,103.761
  Bottom Layer w0.35: R45.1@104.65,136.505 107.345,136.505 111.68,132.17 v2(111.68,106.43)
NetIC7_5: IC7.5 R44.1 | length 53.8
  Top Layer w0.35: v2(112.36,104.85) 112.36,103.61 113.165,102.805 114.462,102.805 114.806,102.461 IC7.5@116.7,102.461
  Bottom Layer w0.35: R44.1@95.83,136.505 97.125,137.8 107.78,137.8 112.59,132.99 112.59,119.53 112.59,118.61 112.84,118.36 112.84,106.04 112.36,105.56 v2(112.36,104.85)
NetIC7_10: IC7.10 R42.2 | length 24.8
  Top Layer w0.35: R42.2@95.82,93.405 98.795,96.38 v2(112.16,96.38) ; v2(112.16,98.91) 114.457,98.91 114.758,99.211 IC7.10@116.7,99.211
  Bottom Layer w0.35: v2(112.16,96.38) v2(112.16,98.91)
NetIC7_12: IC7.12 R43.2 | length 16.3
  Top Layer w0.35: R43.2@103.25,90.945 108.475,90.945 115.441,97.911 IC7.12@116.7,97.911
NetIC7_27: IC7.27 R35.2 | length 8.1
  Top Layer w0.35: IC7.27@122.5,104.411 127.931,104.411 128.21,104.69 R35.2@128.21,106.98
NetQ1_1: Q1.1 R42.1 | length 5.4
  Top Layer w0.35: R42.1@94.42,93.405 Q1.1@94.42,98.775
NetQ2_1: Q2.1 R44.2 | length 5.6
  Bottom Layer w0.35: Q2.1@94.43,130.905 R44.2@94.43,136.505
NetQ3_1: Q3.1 R43.1 | length 6.4
  Top Layer w0.35: R43.1@103.25,92.345 v2(103.25,94.41)
  Bottom Layer w0.35: v2@103.232,94.428 Q3.1@103.232,98.797
NetQ4_1: Q4.1 R45.2 | length 5.6
  Bottom Layer w0.35: Q4.1@103.25,130.915 R45.2@103.25,136.505
NetR31_1: R31.1 R32.2 | length 1.9
  Top Layer w0.35: R31.1@156.54,107.54 R32.2@158.39,107.54
NetR57_1: R57.1 SWD.2 | length 23.8
  Bottom Layer w0.3: R57.1@258.28,106.98 271.78,106.98 275.97,102.79 275.97,100.41 SWD.2@274.59,99.03 SWD.2@274.59,99.114
NetR58_1: R58.1 SWD.4 | length 33.8
  Bottom Layer w0.3: R58.1@253.56,105.82 271.96,105.82 273.27,104.51 273.27,98.35 273.83,97.79 275.61,97.79 276.27,97.13 276.27,95.63 SWD.4@274.59,93.95
NetR59_1: R59.1 SWD.5 | length 21.4
  Bottom Layer w0.3: R59.1@269.63,75.35 273.37,75.35 275.32,77.3 275.32,85.87 275.91,86.46 275.91,90.09 SWD.5@274.59,91.41
NetR60_1: R60.1 SWD.6 | length 38
  Bottom Layer w0.3: R60.1@250.41,84.41 264.31,84.41 271.4,77.32 273.43,77.32 274.59,78.48 SWD.6@274.59,88.87
PC_RX: IC4.7 PC_UART.2 | length 8.7
  Top Layer w0.7: PC_UART.2@186.025,145.019 188.78,142.264 188.78,140.62 190.084,139.316 IC4.7@191.41,139.316
PC_TX: IC4.8 PC_UART.3 | length 5.5
  Top Layer w0.7: PC_UART.3@188.795,145.019 191.41,142.404 IC4.8@191.41,140.586
PIROS: Balancer.1 R12.2 | length 8.4
  Top Layer w0.8: Balancer.1@128.8,61.81 128.8,57.91 130.32,56.39 R12.2@132.67,56.39
SARGA: Balancer.2 R10.2 | length 9.2
  Top Layer w0.8: v2(133.178,64.332) 133.178,62.682 134.18,61.68 R10.2@135.97,61.68
  Bottom Layer w0.8: Balancer.2@128.8,64.35 v2@133.16,64.35
V3P3OUT: C56.2 IC6.15 R28.2 R29.2 R30.2 | length 32.6
  Top Layer w0.5: R30.2@156.54,106.14 164.51,106.14 165.15,106.78 C56.2@165.15,108.61 ; IC6.15@165.15,110.776 C56.2@165.15,108.61 ; R29.2@170.22,119.25 v2(172.05,119.25) ; R28.2@171.57,108.61 C56.2@165.15,108.61
  Bottom Layer w0.5: v2(169.9,108.63) 169.9,114.21 172.05,116.36 v2(172.05,119.25)
pads on no net: H2.5 H3.5 IC1.7 IC3.73 IC4.11 IC4.12 IC4.13 IC4.14 IC5.5 IC5.7 IC6.23 IC10.8 IC11.5 IC11.6 IC11.7 PC_UART.1 PC_UART.4 PC_UART.6 PC_UART.7 PC_UART.8 PC_UART.9 SWD.1 USB_RPI.2 USB_RPI.3
copper on no net:
  other v5: 160.03,66.86 191.2,79.76 222.2,79.76 65.56,87.707 283.56,87.707 65.56,102.707 283.56,102.707 191.2,110.76 222.2,110.76 134.53,121.26

## Polygon pours and split planes (outlines as drawn)
GND on Top Layer "Top Layer-No Net 2" (solid, remove dead copper, pour order 16): 95.06,61.99 111.56,61.99 111.56,36.33 103.21,36.33 95.71,38.2 95.06,42.61
GND on Top Layer "Top Layer-No Net" (solid, remove dead copper, pour order 15): 122.39,36.44 122.39,152.33 124.12,154.06 252.06,154.06 256.13,152.89 260.14,151.4 264.265,148.885 268.88,144.01 272.849,138.652 275.32,132.98 276.08,124.93 276.97,124.04 290.77,124.04 291.92,122.89 291.92,67.22 290.91,66.21 277,66.21 276.08,65.29 276.08,61.01 275.32,57.19 272.26,50.2 267.44,44.55 262.345,40.285 256.49,37.36 254.01,36.67 252.6,36.44
GND on Top Layer "Top Layer-No Net 1" (solid, remove dead copper, pour order 13): 61.026,98.88 60.53,99.338 60.53,123.88 61,124.35 78.09,124.35 78.96,125.22 78.96,129.56 79.57,133.66 81.32,138.42 83.85,142.35 87.04,146.03 91,149.5 95.71,152.34 98.81,153.36 101.59,154.08 134.42,154.08 135.66,152.84 135.66,36.33 104.96,36.33 104.96,126.61 102.925,128.645 101.59,127.31 101.59,58.842 103.31,58.842 103.31,36.33 99.3,36.86 95.33,37.94 89.39,41.11 83.48,47.02 80.46,51.98 78.96,57.41 78.96,59.97 77.84,61.09 61.2,61.09 60.42,61.87 60.42,90.95 60.89,91.42 66.51,91.42 66.82,91.73 66.82,98.534 66.469,98.88
GND on Top Layer "Top Layer-No Net 2" (solid, remove dead copper, pour order 11): 95.67,102.03 116.68,102.03 116.68,82.78 95.67,82.78
GND on Top Layer "Top Layer-No Net 2" (solid, remove dead copper, pour order 14): 139.51,123.75 87.92,123.75 87.92,105.46 139.51,105.46
GND on Bottom Layer "Top Layer-No Net" (solid, remove dead copper, pour order 10): 111.7,36.44 111.7,154.23 252.04,154.23 260.48,151.23 264.165,148.985 267.571,145.581 270.55,142.12 272.888,138.741 274.87,134.49 275.92,130.788 275.92,125.12 277.01,124.03 290.8,124.03 291.88,122.95 291.88,67.22 290.89,66.23 276.97,66.23 276.12,65.38 276.12,60.99 274.87,55.79 272.37,50.29 268.335,45.665 264.68,42.25 260.48,39.27 256.46,37.38 253.95,36.7 252.39,36.44
GND on Bottom Layer "Top Layer-No Net" (solid, remove dead copper, pour order 12): 127.72,56.34 127.72,154.23 101.41,154.23 93.03,150.87 87.18,146.38 82.275,140.115 79.33,131.916 79.33,125.12 78.5,124.29 61.21,124.29 60.55,123.63 60.55,99.35 61.02,98.88 66.47,98.88 66.89,98.46 66.89,91.75 66.56,91.42 60.91,91.42 60.5,91.01 60.5,61.68 61.1,61.08 77.93,61.08 78.95,60.06 78.95,57.37 80.44,51.95 83.49,47.02 89.425,41.085 95.26,37.92 102.05,36.4 114.08,36.4 114.08,46.32 97.55,46.32 97.55,61.08 97.55,84.9 103.99,91.34 103.99,101.71 103.37,102.33 99.35,102.33 99.07,102.61 99.07,105.28 99.45,105.66 101.18,105.66 101.41,105.89 101.41,123.403 100.66,124.18 98.7,124.18 98.43,124.45 98.43,127.2 98.82,127.59 110.92,127.59 111.72,126.79 111.72,56.34

## Keep-outs
Keep-Out Layer:
  lines w1: 77.3,60.161 ccw(c104.497,62.537) 106.722,35.328 ; 77.3,60.207 59.686,60.207 59.686,92.207 66,92.207 66,98.207 59.686,98.207 59.686,125.207 77.686,125.207 ; 77.707,125.231 cw(c105.417,127.497) 102.997,155.194 ; 102.686,155.207 248.023,155.207 ; 105,35.207 248.61,35.207 ; 247.835,155.206 cw(c248.023,125.472) 277.758,125.66 ; 248.141,35.216 ccw(c247.953,64.95) 277.687,65.138 ; 277.686,65.207 293,65.207 293,125.207 277.686,125.207

## Other copper
Top Layer:
  region net 3V3_MCU: 257.66,89.66 257.03,90.29 257.03,92.43 257.24,92.64 258.02,92.64 258.21,92.45 258.21,89.66
  region net 3V3_MCU: 241.66,88.6 239.6,86.54 239.6,85.57 239.83,85.34 244.14,85.34 244.45,85.65 244.45,88.38 244.23,88.6
  region net 11V1: 80.21,85.84 80.21,123.245 84.936,129.45 95.23,129.45 95.595,129.085 95.595,127.625 95.22,127.25 92.31,127.25 91.67,126.61 91.67,103.02 92.27,102.42 95.32,102.42 95.73,102.01 95.73,100.54 95.42,100.23 92.38,100.23 91.72,99.57 91.72,85.82
  region net -: 96.925,102.76 93.495,102.76 93.05,103.205 93.05,119.163 93.647,119.94 99.34,119.94 99.33,112.685 97.558,112.685 97.309,112.422 97.311,110.844 101.77,106.385 101.77,103.27 102.59,102.45 104.12,102.45 104.54,102.03 104.54,100.31 104.46,100.23 99.455,100.23
  region net NetC66_2: 93.566,122.654 93.2,123.02 93.2,126.565 93.545,126.91 96.325,126.91 98.865,129.45 105.16,129.45 105.16,127.25 102.4,127.25 101.76,126.61 101.76,124.135 100.3,122.675
  region net NetC66_2: 119.03,125.27 119.75,125.99 119.75,132.43 119.05,133.13 108.16,133.13 103.46,128.43 103.46,127.65 105.84,125.27
  region net +: 119.68,124.19 119.1,124.77 105.35,124.77 103.11,122.53 103.11,112.725 118.895,112.725 119.689,113.519
  region net 11V1: 117.368,49.94 118.04,50.612 118.04,89.096 116.978,90.202 108.59,84.97 99.539,84.97 89.718,91.502 80.22,91.502 80.22,77.832 93.498,64.554 111.32,54.71 113.06,50.542 113.662,49.94
  region net 11V1: 116.711,96.234 114.78,95.364 114.78,78.876 117.994,78.881 117.986,88.949 117.986,95.224
  region net 11V1: 115.886,107.17 116.006,107.29 116.906,107.29 117.056,107.14 117.056,105.09 117.027,105.061 115.925,105.061 115.886,105.1
  region net NetC61_2: 128.7,106.07 134.86,106.07 135.12,105.81 135.12,104.76 133.284,104.76 132.814,104.28 131.625,104.28 130.982,104.87 128.7,104.87
  region net FEKETE: 130.92,66.75 130.91,66.49 131.69,66.49 131.98,66.75 133.76,66.75 133.76,70.42 134.08,70.74 134.08,71.03 129.92,71.03 128.28,69.39
  region net 11V1: 154.34,111.96 154.34,110.88 156.34,110.88 156.69,111.23 156.69,111.96
  region net 11V1: 159.22,117.18 157.75,117.18 156.49,118.44 154.86,118.44 154.74,118.56 154.74,119.352 153.16,120.734 153.16,124.868 156.48,124.87 156.48,119.98 157.16,119.3 157.16,118.35 158,117.51 159.22,117.51
  region net 11V1: 154.522,123.288 150.63,127.18 150.63,131.37 151.27,132.01 156.3,132.01 157.11,131.2 157.11,124.94 155.44,123.27
  region net A+: 158.9,116.55 158.89,116.54 156.63,116.54 155.87,117.3 154.56,117.3 154.3,117.04 152.82,117.04 152.56,117.3 152.56,118.14 156.27,118.14 157.54,116.87 158.88,116.87 158.9,116.85
  region net B+: 158.06,113.35 157.99,113.28 156.86,113.28 155.84,112.26 152.43,112.26 152.43,113.33 154.08,113.33 154.54,112.87 155.846,112.87 156.607,113.62 158.06,113.62
  region net B-: 155.69,114.75 155.096,114.74 153.673,113.88 152.54,113.88 152.54,114.98 153.325,114.98 153.535,114.92 154.87,114.92
  region net A-: 152.484,115.287 153.11,115.287 153.75,115.287 154.33,115.233 155.172,115.233 154.99,115.57 154.54,115.57 153.72,116.39 153.007,116.39
  region net NetIC6_6: 154.34,116.22 154.68,115.88 158.65,115.88 158.72,115.95 158.72,116.13 158.63,116.22 156.41,116.22 155.65,116.98 154.67,116.98 154.34,116.65
  region net NetIC6_9: 158.098,113.94 156.464,113.94 155.642,113.17 154.76,113.17 154.5,113.43 154.5,114.016 154.905,114.27 158.05,114.27 158.32,114.08
  region net 3V3: 185.08,90.57 185.68,90.12 185.68,87.863 185.16,87.457 177.58,87.457 165.444,81.33 163.358,81.33 153.107,89.227 154.45,90.57
  region net NetAkku_2: 117.98,45.83 117.64,46.17 107.6,46.17 107.09,46.68 102.52,46.68 101.26,45.42 101.26,40.74 102.56,39.44 117.46,39.44 117.98,39.96
  region net 11V1: 117.212,49.94 122.542,44.61 127.6,44.61 130.19,47.2 130.19,47.51 127.45,50.25 117.349,60.351 113.767,49.94
  region net 5V2: 203.88,58.89 203.88,57.281 194.573,54.28 174.662,54.28 169.735,49.75 167.426,49.75 157.159,57.659 158.39,58.89
  region net 11V1: 116.49,80.94 130.43,80.94 132.87,78.5 132.87,77.9 130.64,75.67 116.49,75.67
  region net 3V3: 236.81,42.16 236.81,39.8 237.22,39.39 239.44,39.39 240.77,40.72 240.77,41.24 239.55,42.46 237.11,42.46
  text "TAKACS PETER" at 103.57,147.87 h2
  text "DIPLOMAMUNKA 2015" at 99.54,144.16 h2
  text "BME - SzHVT" at 104.84,140.33 h2
Bottom Layer:
  region net 3V3_MCU: 256.89,92.69 257.04,92.54 257.93,92.54 258.16,92.31 258.16,90.45 257.95,90.24 256.17,90.24 256.1,90.31 256.1,92.69
  region net 3V3_MCU: 256.11,92.93 256.79,92.93 257.58,93.72 258.53,93.72 258.75,93.49 259.47,93.79 259.47,94.59 259.32,94.74 256.5,94.74
  region net 3V3_MCU: 248.23,96.58 249.33,97.68 254.77,97.68 254.87,97.58 254.86,97.57 254.86,95.99 255.91,94.94 253.94,94.94 253.526,94.396 251.611,96.3 250.67,96.3 250.36,95.99 249.68,95.99 249.09,96.58
  region net 3V3_MCU: 258.297,102.047 255.52,99.27 255.52,98.28 257.97,98.28 257.97,100.288 259.229,101.427 259.102,102.024 258.54,102.182
  region net 3V3_MCU: 247.63,101.02 247.63,100.63 248.56,99.7 249.92,99.7 249.92,100.32 249.76,100.48 249.47,100.48 248.45,101.5 247.83,101.5 247.63,101.3
  region net 11V1: 93.12,129.46 92.85,129.19 92.85,127.54 93.15,127.24 95.569,127.24 96.177,126.397 96.178,124.636 98.18,124.636 98.18,128.975 97.695,129.46
  region net GND: 102.341,126.919 102.04,126.609 102.04,103.22 102.49,102.77 103.8,102.77 104.62,101.95 104.62,87.085 110.8,87.085 110.8,126.925
  region net GND: 102.581,126.919 99.699,126.919 99.36,126.58 99.36,124.92 99.62,124.66 101.14,124.66 102.599,123.201
  region net GND: 104.21,102.76 99.78,102.76 99.59,102.95 99.59,104.9 99.81,105.12 101.346,105.12 104.21,107.951
  region net 11V1: 98.21,104.92 98.21,101.76 96.68,100.23 93.57,100.23 93.26,100.54 93.26,102.09 93.59,102.42 95.14,102.42 96.17,103.45 96.17,104.92
  region net GND: 98.54,84.416 98.54,51.15 102.58,47.11 108.04,47.11 110.8,49.87 110.8,87.69 106.307,92.183
  region net 11V1: 116.046,87.95 115.446,87.399 115.446,82.76 115.776,82.43 117.166,82.43 117.506,82.77 117.506,87.41 116.916,87.95
  region net 11V1: 116.033,105.48 115.806,105.658 115.806,107.14 115.976,107.31 116.956,107.31 117.146,107.12 117.146,105.66 116.966,105.48
  region net 11V1: 155.51,111.05 155.7,110.86 157.19,110.86 157.4,111.07 157.4,119.31 157.09,119.62 156.2,119.62 155.96,119.38 155.96,112.317 155.51,111.867
  region net NetIC6_6: 154.18,116 154.48,115.7 155.35,115.7 155.53,115.88 155.53,122.88 155.05,123.36 152.18,123.36 152.05,123.23 152.05,119.52 153.12,118.45 153.8,118.45 154.18,118.07
  region net NetIC6_9: 153.89,113.81 154.56,114.48 155.5,114.48 155.66,114.32 155.66,112.74 155.14,112.22 155.14,110.74 155.5,110.38 155.5,107.06 155.39,106.95 153.37,106.95 153.37,112.01 153.89,112.53
  region net 3V3: 184.5,91.56 184.04,91.56 182.68,90.2 182.68,87.98 183.15,87.51 185.39,87.51 186.41,88.53 186.41,89.65
  region net 3V3: 236.23,41.58 236.23,40.38 237.22,39.39 239.44,39.39 239.91,39.86 239.91,42.1 239.56,42.45 237.1,42.45

## Silkscreen, mask and mechanical layers (free items; w line width, h text height)
Top Overlay:
  lines w1: 137.02,41.24 137.02,21.24 162.02,21.24 162.02,41.24 ; 138.01,126.26 138.01,161.26 158.01,161.26 158.01,126.26 ; 122.03,41.26 178.03,41.26 178.03,126.26 122.03,126.26 122.03,41.26 ; 185.7,74.26 227.7,74.26 227.7,116.26 185.7,116.26 185.7,74.26 ; 213,120 213,154 260,154 260,120 213,120

## Text inside footprints (layer, text, board x,y; h text height)
H1: Top Overlay "2" at 233.468,70.352 h1.27 r90; Top Overlay "1" at 236.008,70.352 h1.27 r90; Top Overlay "33" at 236.008,115.564 h1.27 r90; Top Overlay "34" at 233.468,115.564 h1.27 r90
PC_UART: Top Overlay "1" at 183.005,141.564 h1.5; Top Overlay "5" at 193.835,141.564 h1.5; Top Overlay "9" at 192.45,150.964 h1.5; Top Overlay "6" at 184.14,150.964 h1.5
Q1: Top Overlay "3" at 98.957,103.367 h1.5 r90; Top Overlay "2" at 98.957,100.827 h1.5 r90; Top Overlay "1" at 98.957,98.537 h1.5 r90
Q2: Top Overlay "3" at 89.893,126.313 h1.5 r270; Top Overlay "2" at 89.893,128.853 h1.5 r270; Top Overlay "1" at 89.893,131.143 h1.5 r270
Q3: Top Overlay "3" at 107.757,103.377 h1.5 r90; Top Overlay "2" at 107.757,100.837 h1.5 r90; Top Overlay "1" at 107.757,98.547 h1.5 r90
Q4: Top Overlay "3" at 98.703,126.313 h1.5 r270; Top Overlay "2" at 98.703,128.853 h1.5 r270; Top Overlay "1" at 98.703,131.143 h1.5 r270